# EAGLE board Breakout (EAGLE 8.4.1)
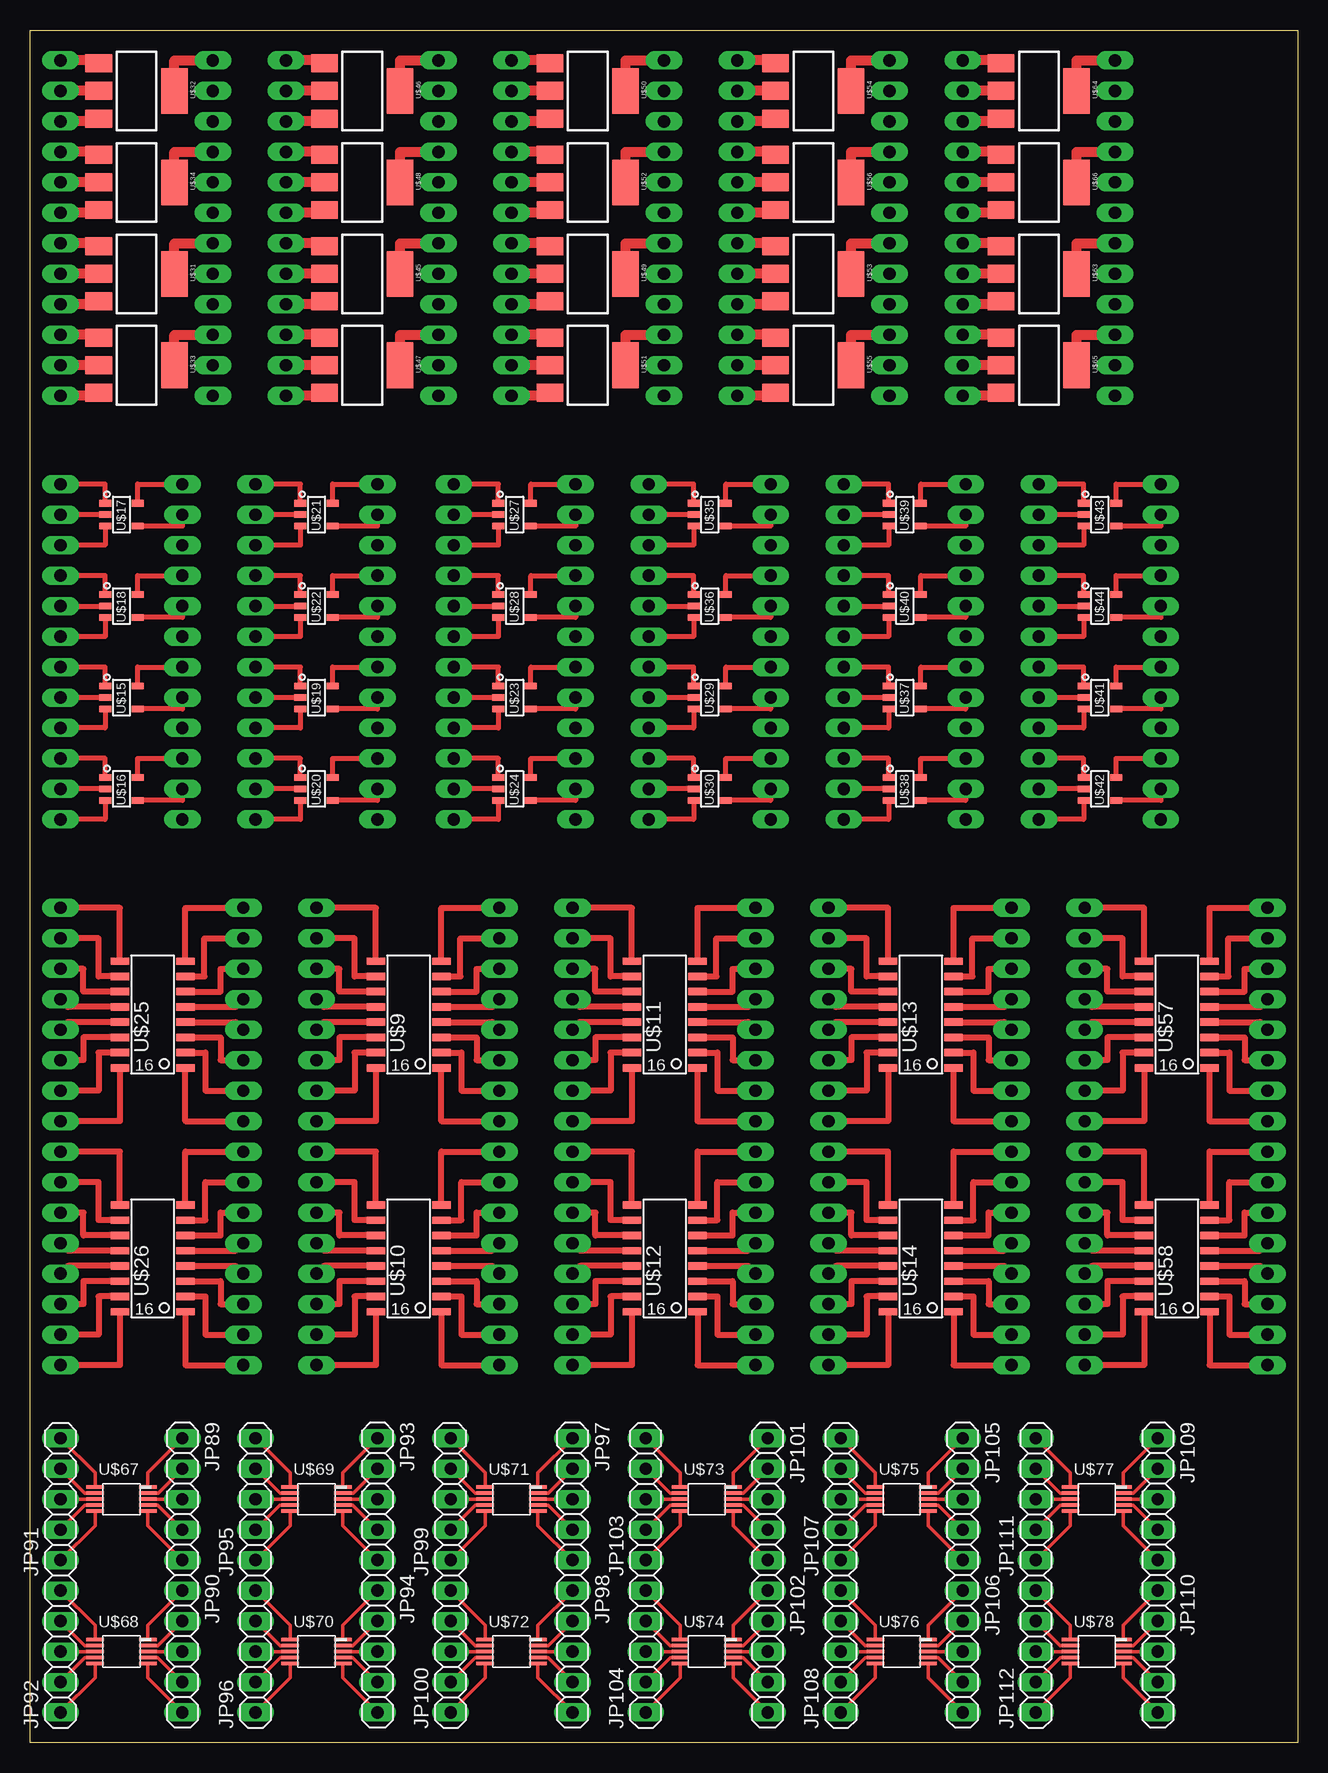
[diagram p0: board, top side]
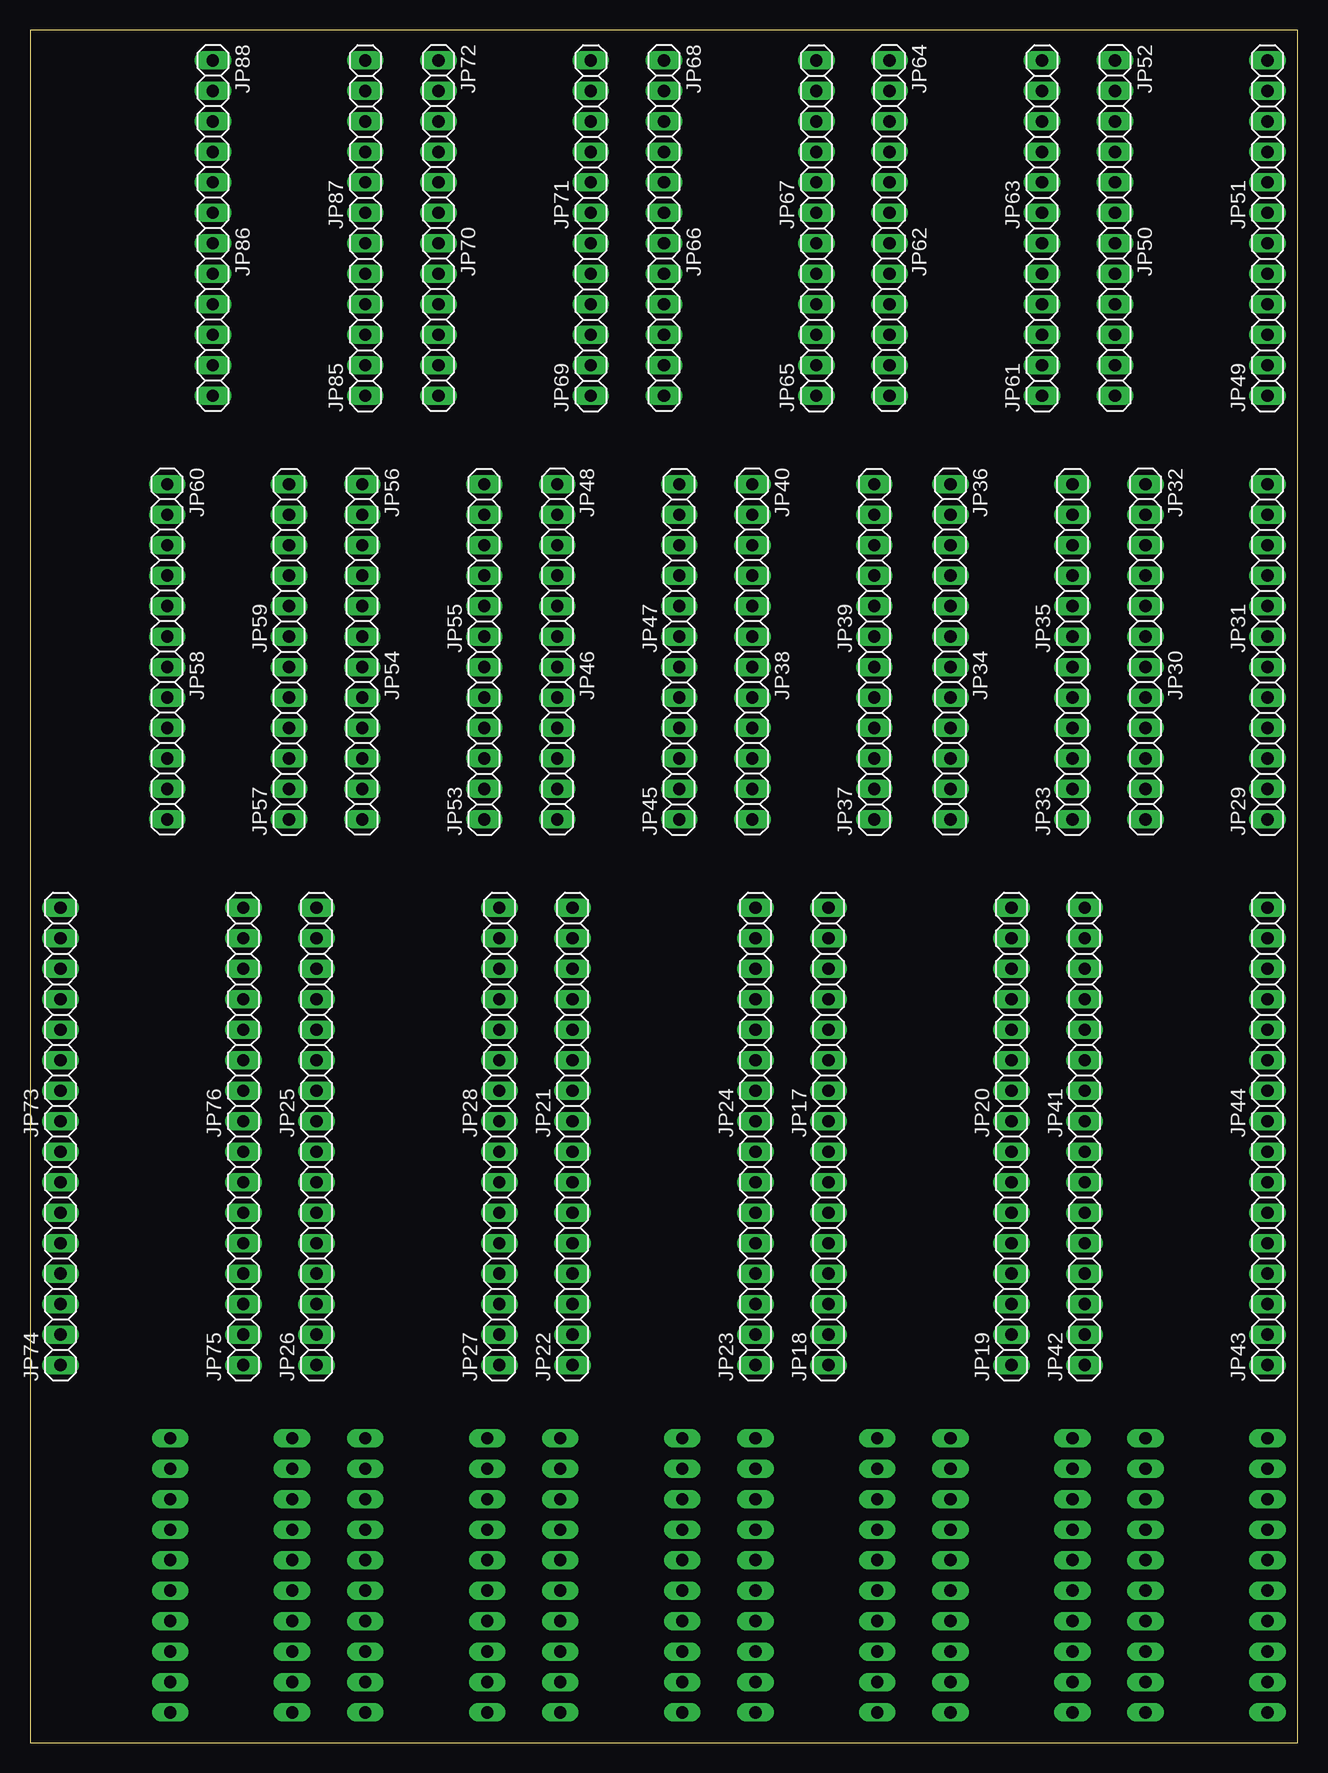
[diagram p1: board, bottom side, seen from below]

Size 105.66 x 142.75 mm. Coordinates in mm from the lower left corner, seen from the top.
Outline: 0,0 0,142.75 105.66,142.75 105.66,0 0,0
Copper layers (1*16): Top 0.035mm / dielectric 1.5mm / Bottom 0.035mm
Design rules "DRC Advanced Circuits": minimum track width 6mil, minimum drill 15mil, track to track 6mil, track to pad 6mil, pad to pad 6mil, via to via 6mil, smd to smd 6mil, copper to edge 40mil, drill to drill 6mil, minimum pad ring 10mil, minimum via ring 8mil, stop-mask expansion 4mil, vias tented up to drill 0mil, thermal gap 10mil

## Footprints (pad centres in the part's own frame; a part is rotated, then mirrored left to right if it is on the bottom)
1X08 = drill 1.016 long: 1 -8.89,0; 2 -6.35,0; 3 -3.81,0; 4 -1.27,0; 5 1.27,0; 6 3.81,0; 7 6.35,0; 8 8.89,0
1X06 = drill 1.016 long: 1 -6.35,0; 2 -3.81,0; 3 -1.27,0; 4 1.27,0; 5 3.81,0; 6 6.35,0
1X05 = drill 1.016 long: 1 -5.08,0; 2 -2.54,0; 3 0,0; 4 2.54,0; 5 5.08,0
SOIC-16 = smd 0.61 x 1.524: 1 -4.445,-2.794; 2 -3.175,-2.794; 3 -1.905,-2.794; 4 -0.635,-2.794; 5 0.635,-2.794; 6 1.905,-2.794; 7 3.175,-2.794; 8 4.445,-2.794; 9 4.445,2.667; 10 3.175,2.667; 11 1.905,2.667; 12 0.635,2.667; 13 -0.635,2.667; 14 -1.905,2.667; 15 -3.175,2.667; 16 -4.445,2.667
SOT-23-5 = smd 1 x 0.55: 1 -1.35,0.95; 2 -1.35,0; 3 -1.35,-0.95; 4 1.35,-0.95; 5 1.35,0.95
SOT223 = smd 1.5 x 2.235: 1 -2.3,-3.15; 2 0,-3.15; 3 2.3,-3.15 | smd 3.8 x 2.2: 4 0,3.15
VSSOP-10 = smd 0.3 x 1.45: 1 -1,-2.2; 2 -0.5,-2.2; 3 0,-2.2; 4 0.5,-2.2; 5 1,-2.2; 6 1,2.2; 7 0.5,2.2; 8 0,2.2; 9 -0.5,2.2; 10 -1,2.2

## Placement (x,y rotation side)
JP17  [1X08]  39.12,60.71 90 bottom
JP18  [1X08]  39.12,40.39 90 bottom
JP19  [1X08]  23.88,40.39 90 bottom
JP20  [1X08]  23.88,60.71 90 bottom
JP21  [1X08]  60.45,60.71 90 bottom
JP22  [1X08]  60.45,40.39 90 bottom
JP23  [1X08]  45.21,40.39 90 bottom
JP24  [1X08]  45.21,60.71 90 bottom
JP25  [1X08]  81.79,60.71 90 bottom
JP26  [1X08]  81.79,40.39 90 bottom
JP27  [1X08]  66.55,40.39 90 bottom
JP28  [1X08]  66.55,60.71 90 bottom
JP29  [1X06]  2.54,83.31 90 bottom
JP30  [1X06]  12.7,83.31 270 bottom
JP31  [1X06]  2.54,98.55 90 bottom
JP32  [1X06]  12.7,98.55 270 bottom
JP33  [1X06]  18.8,83.31 90 bottom
JP34  [1X06]  28.96,83.31 270 bottom
JP35  [1X06]  18.8,98.55 90 bottom
JP36  [1X06]  28.96,98.55 270 bottom
JP37  [1X06]  35.31,83.31 90 bottom
JP38  [1X06]  45.47,83.31 270 bottom
JP39  [1X06]  35.31,98.55 90 bottom
JP40  [1X06]  45.47,98.55 270 bottom
JP41  [1X08]  17.78,60.71 90 bottom
JP42  [1X08]  17.78,40.39 90 bottom
JP43  [1X08]  2.54,40.39 90 bottom
JP44  [1X08]  2.54,60.71 90 bottom
JP45  [1X06]  51.56,83.31 90 bottom
JP46  [1X06]  61.72,83.31 270 bottom
JP47  [1X06]  51.56,98.55 90 bottom
JP48  [1X06]  61.72,98.55 270 bottom
JP49  [1X06]  2.54,118.62 90 bottom
JP50  [1X06]  15.24,118.62 270 bottom
JP51  [1X06]  2.54,133.86 90 bottom
JP52  [1X06]  15.24,133.86 270 bottom
JP53  [1X06]  67.82,83.31 90 bottom
JP54  [1X06]  77.98,83.31 270 bottom
JP55  [1X06]  67.82,98.55 90 bottom
JP56  [1X06]  77.98,98.55 270 bottom
JP57  [1X06]  84.07,83.31 90 bottom
JP58  [1X06]  94.23,83.31 270 bottom
JP59  [1X06]  84.07,98.55 90 bottom
JP60  [1X06]  94.23,98.55 270 bottom
JP61  [1X06]  21.34,118.62 90 bottom
JP62  [1X06]  34.04,118.62 270 bottom
JP63  [1X06]  21.34,133.86 90 bottom
JP64  [1X06]  34.04,133.86 270 bottom
JP65  [1X06]  40.13,118.62 90 bottom
JP66  [1X06]  52.83,118.62 270 bottom
JP67  [1X06]  40.13,133.86 90 bottom
JP68  [1X06]  52.83,133.86 270 bottom
JP69  [1X06]  58.93,118.62 90 bottom
JP70  [1X06]  71.63,118.62 270 bottom
JP71  [1X06]  58.93,133.86 90 bottom
JP72  [1X06]  71.63,133.86 270 bottom
JP73  [1X08]  103.12,60.71 90 bottom
JP74  [1X08]  103.12,40.39 90 bottom
JP75  [1X08]  87.88,40.39 90 bottom
JP76  [1X08]  87.88,60.71 90 bottom
JP85  [1X06]  77.72,118.62 90 bottom
JP86  [1X06]  90.42,118.62 270 bottom
JP87  [1X06]  77.72,133.86 90 bottom
JP88  [1X06]  90.42,133.86 270 bottom
JP89  [1X05]  12.7,20.32 270 top
JP90  [1X05]  12.7,7.62 270 top
JP91  [1X05]  2.54,20.32 90 top
JP92  [1X05]  2.54,7.62 90 top
JP93  [1X05]  28.96,20.32 270 top
JP94  [1X05]  28.96,7.62 270 top
JP95  [1X05]  18.8,20.32 90 top
JP96  [1X05]  18.8,7.62 90 top
JP97  [1X05]  45.21,20.32 270 top
JP98  [1X05]  45.21,7.62 270 top
JP99  [1X05]  35.05,20.32 90 top
JP100  [1X05]  35.05,7.62 90 top
JP101  [1X05]  61.47,20.32 270 top
JP102  [1X05]  61.47,7.62 270 top
JP103  [1X05]  51.31,20.32 90 top
JP104  [1X05]  51.31,7.62 90 top
JP105  [1X05]  77.72,20.32 270 top
JP106  [1X05]  77.72,7.62 270 top
JP107  [1X05]  67.56,20.32 90 top
JP108  [1X05]  67.56,7.62 90 top
JP109  [1X05]  93.98,20.32 270 top
JP110  [1X05]  93.98,7.62 270 top
JP111  [1X05]  83.82,20.32 90 top
JP112  [1X05]  83.82,7.62 90 top
U$9  SOIC16  [SOIC-16]  31.5,60.71 90 top
U$10  SOIC16  [SOIC-16]  31.5,40.39 90 top
U$11  SOIC16  [SOIC-16]  52.83,60.71 90 top
U$12  SOIC16  [SOIC-16]  52.83,40.39 90 top
U$13  SOIC16  [SOIC-16]  74.17,60.71 90 top
U$14  SOIC16  [SOIC-16]  74.17,40.39 90 top
U$15  SN74LVC1G06  [SOT-23-5]  7.62,87.12 0 top
U$16  SN74LVC1G07  [SOT-23-5]  7.62,79.5 0 top
U$17  SN74LVC1G06  [SOT-23-5]  7.62,102.36 0 top
U$18  SN74LVC1G07  [SOT-23-5]  7.62,94.74 0 top
U$19  SN74LVC1G06  [SOT-23-5]  23.88,87.12 0 top
U$20  SN74LVC1G07  [SOT-23-5]  23.88,79.5 0 top
U$21  SN74LVC1G06  [SOT-23-5]  23.88,102.36 0 top
U$22  SN74LVC1G07  [SOT-23-5]  23.88,94.74 0 top
U$23  SN74LVC1G06  [SOT-23-5]  40.39,87.12 0 top
U$24  SN74LVC1G07  [SOT-23-5]  40.39,79.5 0 top
U$25  SOIC16  [SOIC-16]  10.16,60.71 90 top
U$26  SOIC16  [SOIC-16]  10.16,40.39 90 top
U$27  SN74LVC1G06  [SOT-23-5]  40.39,102.36 0 top
U$28  SN74LVC1G07  [SOT-23-5]  40.39,94.74 0 top
U$29  SN74LVC1G06  [SOT-23-5]  56.64,87.12 0 top
U$30  SN74LVC1G07  [SOT-23-5]  56.64,79.5 0 top
U$31  SOT223  [SOT223]  8.89,122.43 270 top
U$32  SOT223  [SOT223]  8.89,137.67 270 top
U$33  SOT223  [SOT223]  8.89,114.81 270 top
U$34  SOT223  [SOT223]  8.89,130.05 270 top
U$35  SN74LVC1G06  [SOT-23-5]  56.64,102.36 0 top
U$36  SN74LVC1G07  [SOT-23-5]  56.64,94.74 0 top
U$37  SN74LVC1G06  [SOT-23-5]  72.9,87.12 0 top
U$38  SN74LVC1G07  [SOT-23-5]  72.9,79.5 0 top
U$39  SN74LVC1G06  [SOT-23-5]  72.9,102.36 0 top
U$40  SN74LVC1G07  [SOT-23-5]  72.9,94.74 0 top
U$41  SN74LVC1G06  [SOT-23-5]  89.15,87.12 0 top
U$42  SN74LVC1G07  [SOT-23-5]  89.15,79.5 0 top
U$43  SN74LVC1G06  [SOT-23-5]  89.15,102.36 0 top
U$44  SN74LVC1G07  [SOT-23-5]  89.15,94.74 0 top
U$45  SOT223  [SOT223]  27.69,122.43 270 top
U$46  SOT223  [SOT223]  27.69,137.67 270 top
U$47  SOT223  [SOT223]  27.69,114.81 270 top
U$48  SOT223  [SOT223]  27.69,130.05 270 top
U$49  SOT223  [SOT223]  46.48,122.43 270 top
U$50  SOT223  [SOT223]  46.48,137.67 270 top
U$51  SOT223  [SOT223]  46.48,114.81 270 top
U$52  SOT223  [SOT223]  46.48,130.05 270 top
U$53  SOT223  [SOT223]  65.28,122.43 270 top
U$54  SOT223  [SOT223]  65.28,137.67 270 top
U$55  SOT223  [SOT223]  65.28,114.81 270 top
U$56  SOT223  [SOT223]  65.28,130.05 270 top
U$57  SOIC16  [SOIC-16]  95.5,60.71 90 top
U$58  SOIC16  [SOIC-16]  95.5,40.39 90 top
U$63  SOT223  [SOT223]  84.07,122.43 270 top
U$64  SOT223  [SOT223]  84.07,137.67 270 top
U$65  SOT223  [SOT223]  84.07,114.81 270 top
U$66  SOT223  [SOT223]  84.07,130.05 270 top
U$67  INA226  [VSSOP-10]  7.62,20.32 270 top
U$68  INA226  [VSSOP-10]  7.62,7.62 270 top
U$69  INA226  [VSSOP-10]  23.88,20.32 270 top
U$70  INA226  [VSSOP-10]  23.88,7.62 270 top
U$71  INA226  [VSSOP-10]  40.13,20.32 270 top
U$72  INA226  [VSSOP-10]  40.13,7.62 270 top
U$73  INA226  [VSSOP-10]  56.39,20.32 270 top
U$74  INA226  [VSSOP-10]  56.39,7.62 270 top
U$75  INA226  [VSSOP-10]  72.64,20.32 270 top
U$76  INA226  [VSSOP-10]  72.64,7.62 270 top
U$77  INA226  [VSSOP-10]  88.9,20.32 270 top
U$78  INA226  [VSSOP-10]  88.9,7.62 270 top

## Library data of the parts
JP17-JP76 JP85-JP112 U$9-U$58 U$63-U$78 = HyTechDevices

## Nets
N$81: JP17.1 U$9.1
N$82: JP17.2 U$9.2
N$83: JP17.3 U$9.3
N$84: JP17.4 U$9.4
N$85: JP17.5 U$9.5
N$86: JP17.6 U$9.6
N$87: JP17.7 U$9.7
N$88: JP17.8 U$9.8
N$89: JP18.1 U$10.1
N$90: JP18.2 U$10.2
N$91: JP18.3 U$10.3
N$92: JP18.4 U$10.4
N$93: JP18.5 U$10.5
N$94: JP18.6 U$10.6
N$95: JP18.7 U$10.7
N$96: JP18.8 U$10.8
N$97: JP19.1 U$10.16
N$98: JP19.2 U$10.15
N$99: JP19.3 U$10.14
N$100: JP19.4 U$10.13
N$101: JP19.5 U$10.12
N$102: JP19.6 U$10.11
N$103: JP19.7 U$10.10
N$104: JP19.8 U$10.9
N$105: JP20.1 U$9.16
N$106: JP20.2 U$9.15
N$107: JP20.3 U$9.14
N$108: JP20.4 U$9.13
N$109: JP20.5 U$9.12
N$110: JP20.6 U$9.11
N$111: JP20.7 U$9.10
N$112: JP20.8 U$9.9
N$113: JP21.1 U$11.1
N$114: JP21.2 U$11.2
N$115: JP21.3 U$11.3
N$116: JP21.4 U$11.4
N$117: JP21.5 U$11.5
N$118: JP21.6 U$11.6
N$119: JP21.7 U$11.7
N$120: JP21.8 U$11.8
N$121: JP22.1 U$12.1
N$122: JP22.2 U$12.2
N$123: JP22.3 U$12.3
N$124: JP22.4 U$12.4
N$125: JP22.5 U$12.5
N$126: JP22.6 U$12.6
N$127: JP22.7 U$12.7
N$128: JP22.8 U$12.8
N$129: JP23.1 U$12.16
N$130: JP23.2 U$12.15
N$131: JP23.3 U$12.14
N$132: JP23.4 U$12.13
N$133: JP23.5 U$12.12
N$134: JP23.6 U$12.11
N$135: JP23.7 U$12.10
N$136: JP23.8 U$12.9
N$137: JP24.1 U$11.16
N$138: JP24.2 U$11.15
N$139: JP24.3 U$11.14
N$140: JP24.4 U$11.13
N$141: JP24.5 U$11.12
N$142: JP24.6 U$11.11
N$143: JP24.7 U$11.10
N$144: JP24.8 U$11.9
N$145: JP25.1 U$13.1
N$146: JP25.2 U$13.2
N$147: JP25.3 U$13.3
N$148: JP25.4 U$13.4
N$149: JP25.5 U$13.5
N$150: JP25.6 U$13.6
N$151: JP25.7 U$13.7
N$152: JP25.8 U$13.8
N$153: JP26.1 U$14.1
N$154: JP26.2 U$14.2
N$155: JP26.3 U$14.3
N$156: JP26.4 U$14.4
N$157: JP26.5 U$14.5
N$158: JP26.6 U$14.6
N$159: JP26.7 U$14.7
N$160: JP26.8 U$14.8
N$161: JP27.1 U$14.16
N$162: JP27.2 U$14.15
N$163: JP27.3 U$14.14
N$164: JP27.4 U$14.13
N$165: JP27.5 U$14.12
N$166: JP27.6 U$14.11
N$167: JP27.7 U$14.10
N$168: JP27.8 U$14.9
N$169: JP28.1 U$13.16
N$170: JP28.2 U$13.15
N$171: JP28.3 U$13.14
N$172: JP28.4 U$13.13
N$173: JP28.5 U$13.12
N$174: JP28.6 U$13.11
N$175: JP28.7 U$13.10
N$176: JP28.8 U$13.9
N$177: JP30.1 U$15.5
N$178: JP30.2 U$15.4
N$179: JP30.4 U$16.5
N$180: JP30.5 U$16.4
N$181: JP29.6 U$15.1
N$182: JP29.5 U$15.2
N$183: JP29.4 U$15.3
N$184: JP29.3 U$16.1
N$185: JP29.2 U$16.2
N$186: JP29.1 U$16.3
N$187: JP32.1 U$17.5
N$188: JP32.2 U$17.4
N$189: JP32.4 U$18.5
N$190: JP32.5 U$18.4
N$191: JP31.6 U$17.1
N$192: JP31.5 U$17.2
N$193: JP31.4 U$17.3
N$194: JP31.3 U$18.1
N$195: JP31.2 U$18.2
N$196: JP31.1 U$18.3
N$197: JP34.1 U$19.5
N$198: JP34.2 U$19.4
N$199: JP34.4 U$20.5
N$200: JP34.5 U$20.4
N$201: JP33.6 U$19.1
N$202: JP33.5 U$19.2
N$203: JP33.4 U$19.3
N$204: JP33.3 U$20.1
N$205: JP33.2 U$20.2
N$206: JP33.1 U$20.3
N$207: JP36.1 U$21.5
N$208: JP36.2 U$21.4
N$209: JP36.4 U$22.5
N$210: JP36.5 U$22.4
N$211: JP35.6 U$21.1
N$212: JP35.5 U$21.2
N$213: JP35.4 U$21.3
N$214: JP35.3 U$22.1
N$215: JP35.2 U$22.2
N$216: JP35.1 U$22.3
N$217: JP38.1 U$23.5
N$218: JP38.2 U$23.4
N$219: JP38.4 U$24.5
N$220: JP38.5 U$24.4
N$221: JP37.6 U$23.1
N$222: JP37.5 U$23.2
N$223: JP37.4 U$23.3
N$224: JP37.3 U$24.1
N$225: JP37.2 U$24.2
N$226: JP37.1 U$24.3
N$227: JP40.1 U$27.5
N$228: JP40.2 U$27.4
N$229: JP40.4 U$28.5
N$230: JP40.5 U$28.4
N$231: JP39.6 U$27.1
N$232: JP39.5 U$27.2
N$233: JP39.4 U$27.3
N$234: JP39.3 U$28.1
N$235: JP39.2 U$28.2
N$236: JP39.1 U$28.3
N$237: JP46.1 U$29.5
N$238: JP46.2 U$29.4
N$239: JP46.4 U$30.5
N$240: JP46.5 U$30.4
N$241: JP45.6 U$29.1
N$242: JP45.5 U$29.2
N$243: JP45.4 U$29.3
N$244: JP45.3 U$30.1
N$245: JP41.1 U$25.1
N$246: JP41.2 U$25.2
N$247: JP41.3 U$25.3
N$248: JP41.4 U$25.4
N$249: JP41.5 U$25.5
N$250: JP41.6 U$25.6
N$251: JP41.7 U$25.7
N$252: JP41.8 U$25.8
N$253: JP42.1 U$26.1
N$254: JP42.2 U$26.2
N$255: JP42.3 U$26.3
N$256: JP42.4 U$26.4
N$257: JP42.5 U$26.5
N$258: JP42.6 U$26.6
N$259: JP42.7 U$26.7
N$260: JP42.8 U$26.8
N$261: JP43.1 U$26.16
N$262: JP43.2 U$26.15
N$263: JP43.3 U$26.14
N$264: JP43.4 U$26.13
N$265: JP43.5 U$26.12
N$266: JP43.6 U$26.11
N$267: JP43.7 U$26.10
N$268: JP43.8 U$26.9
N$269: JP44.1 U$25.16
N$270: JP44.2 U$25.15
N$271: JP44.3 U$25.14
N$272: JP44.4 U$25.13
N$273: JP44.5 U$25.12
N$274: JP44.6 U$25.11
N$275: JP44.7 U$25.10
N$276: JP44.8 U$25.9
N$277: JP45.2 U$30.2
N$278: JP45.1 U$30.3
N$279: JP48.1 U$35.5
N$280: JP48.2 U$35.4
N$281: JP48.4 U$36.5
N$282: JP48.5 U$36.4
N$283: JP47.6 U$35.1
N$284: JP47.5 U$35.2
N$285: JP47.4 U$35.3
N$286: JP47.3 U$36.1
N$287: JP47.2 U$36.2
N$288: JP47.1 U$36.3
N$289: JP54.1 U$37.5
N$290: JP54.2 U$37.4
N$291: JP54.4 U$38.5
N$292: JP54.5 U$38.4
N$293: JP53.6 U$37.1
N$294: JP53.5 U$37.2
N$295: JP53.4 U$37.3
N$296: JP53.3 U$38.1
N$297: JP50.1 U$31.4
N$298: JP49.6 U$31.1
N$299: JP49.5 U$31.2
N$300: JP49.4 U$31.3
N$301: JP49.3 U$33.1
N$302: JP49.2 U$33.2
N$303: JP49.1 U$33.3
N$304: JP50.4 U$33.4
N$305: JP52.1 U$32.4
N$306: JP52.4 U$34.4
N$307: JP51.6 U$32.1
N$308: JP51.5 U$32.2
N$309: JP51.4 U$32.3
N$310: JP51.3 U$34.1
N$311: JP51.2 U$34.2
N$312: JP51.1 U$34.3
N$313: JP53.2 U$38.2
N$314: JP53.1 U$38.3
N$315: JP56.1 U$39.5
N$316: JP56.2 U$39.4
N$317: JP56.4 U$40.5
N$318: JP56.5 U$40.4
N$319: JP55.6 U$39.1
N$320: JP55.5 U$39.2
N$321: JP55.4 U$39.3
N$322: JP55.3 U$40.1
N$323: JP55.2 U$40.2
N$324: JP55.1 U$40.3
N$325: JP58.1 U$41.5
N$326: JP58.2 U$41.4
N$327: JP58.4 U$42.5
N$328: JP58.5 U$42.4
N$329: JP57.6 U$41.1
N$330: JP57.5 U$41.2
N$331: JP57.4 U$41.3
N$332: JP57.3 U$42.1
N$333: JP57.2 U$42.2
N$334: JP57.1 U$42.3
N$335: JP60.1 U$43.5
N$336: JP60.2 U$43.4
N$337: JP60.4 U$44.5
N$338: JP60.5 U$44.4
N$339: JP59.6 U$43.1
N$340: JP59.5 U$43.2
N$341: JP59.4 U$43.3
N$342: JP59.3 U$44.1
N$343: JP59.2 U$44.2
N$344: JP59.1 U$44.3
N$345: JP62.1 U$45.4
N$346: JP61.6 U$45.1
N$347: JP61.5 U$45.2
N$348: JP61.4 U$45.3
N$349: JP61.3 U$47.1
N$350: JP61.2 U$47.2
N$351: JP61.1 U$47.3
N$352: JP62.4 U$47.4
N$353: JP64.1 U$46.4
N$354: JP64.4 U$48.4
N$355: JP63.6 U$46.1
N$356: JP63.5 U$46.2
N$357: JP63.4 U$46.3
N$358: JP63.3 U$48.1
N$359: JP63.2 U$48.2
N$360: JP63.1 U$48.3
N$361: JP66.1 U$49.4
N$362: JP65.6 U$49.1
N$363: JP65.5 U$49.2
N$364: JP65.4 U$49.3
N$365: JP65.3 U$51.1
N$366: JP65.2 U$51.2
N$367: JP65.1 U$51.3
N$368: JP66.4 U$51.4
N$369: JP68.1 U$50.4
N$370: JP68.4 U$52.4
N$371: JP67.6 U$50.1
N$372: JP67.5 U$50.2
N$373: JP67.4 U$50.3
N$374: JP67.3 U$52.1
N$375: JP67.2 U$52.2
N$376: JP67.1 U$52.3
N$377: JP70.1 U$53.4
N$378: JP69.6 U$53.1
N$379: JP69.5 U$53.2
N$380: JP69.4 U$53.3
N$381: JP69.3 U$55.1
N$382: JP69.2 U$55.2
N$383: JP69.1 U$55.3
N$384: JP70.4 U$55.4
N$385: JP72.1 U$54.4
N$386: JP72.4 U$56.4
N$387: JP71.6 U$54.1
N$388: JP71.5 U$54.2
N$389: JP71.4 U$54.3
N$390: JP71.3 U$56.1
N$391: JP71.2 U$56.2
N$392: JP71.1 U$56.3
N$393: JP73.1 U$57.1
N$394: JP73.2 U$57.2
N$395: JP73.3 U$57.3
N$396: JP73.4 U$57.4
N$397: JP73.5 U$57.5
N$398: JP73.6 U$57.6
N$399: JP73.7 U$57.7
N$400: JP73.8 U$57.8
N$401: JP74.1 U$58.1
N$402: JP74.2 U$58.2
N$403: JP74.3 U$58.3
N$404: JP74.4 U$58.4
N$405: JP74.5 U$58.5
N$406: JP74.6 U$58.6
N$407: JP74.7 U$58.7
N$408: JP74.8 U$58.8
N$409: JP75.1 U$58.16
N$410: JP75.2 U$58.15
N$411: JP75.3 U$58.14
N$412: JP75.4 U$58.13
N$413: JP75.5 U$58.12
N$414: JP75.6 U$58.11
N$415: JP75.7 U$58.10
N$416: JP75.8 U$58.9
N$417: JP76.1 U$57.16
N$418: JP76.2 U$57.15
N$419: JP76.3 U$57.14
N$420: JP76.4 U$57.13
N$421: JP76.5 U$57.12
N$422: JP76.6 U$57.11
N$423: JP76.7 U$57.10
N$424: JP76.8 U$57.9
N$465: JP86.1 U$63.4
N$466: JP85.6 U$63.1
N$467: JP85.5 U$63.2
N$468: JP85.4 U$63.3
N$469: JP85.3 U$65.1
N$470: JP85.2 U$65.2
N$471: JP85.1 U$65.3
N$472: JP86.4 U$65.4
N$473: JP88.1 U$64.4
N$474: JP88.4 U$66.4
N$475: JP87.6 U$64.1
N$476: JP87.5 U$64.2
N$477: JP87.4 U$64.3
N$478: JP87.3 U$66.1
N$479: JP87.2 U$66.2
N$480: JP87.1 U$66.3
N$481: JP92.1 U$68.5
N$482: JP92.2 U$68.4
N$483: JP92.3 U$68.3
N$484: JP92.4 U$68.2
N$485: JP92.5 U$68.1
N$486: JP91.1 U$67.5
N$487: JP91.2 U$67.4
N$488: JP91.3 U$67.3
N$489: JP91.4 U$67.2
N$490: JP91.5 U$67.1
N$491: JP90.1 U$68.10
N$492: JP90.2 U$68.9
N$493: JP90.3 U$68.8
N$494: JP90.4 U$68.7
N$495: JP90.5 U$68.6
N$496: JP89.1 U$67.10
N$497: JP89.2 U$67.9
N$498: JP89.3 U$67.8
N$499: JP89.4 U$67.7
N$500: JP89.5 U$67.6
N$501: JP96.1 U$70.5
N$502: JP96.2 U$70.4
N$503: JP96.3 U$70.3
N$504: JP96.4 U$70.2
N$505: JP96.5 U$70.1
N$506: JP95.1 U$69.5
N$507: JP95.2 U$69.4
N$508: JP95.3 U$69.3
N$509: JP95.4 U$69.2
N$510: JP95.5 U$69.1
N$511: JP94.1 U$70.10
N$512: JP94.2 U$70.9
N$513: JP94.3 U$70.8
N$514: JP94.4 U$70.7
N$515: JP94.5 U$70.6
N$516: JP93.1 U$69.10
N$517: JP93.2 U$69.9
N$518: JP93.3 U$69.8
N$519: JP93.4 U$69.7
N$520: JP93.5 U$69.6
N$521: JP100.1 U$72.5
N$522: JP100.2 U$72.4
N$523: JP100.3 U$72.3
N$524: JP100.4 U$72.2
N$525: JP100.5 U$72.1
N$526: JP99.1 U$71.5
N$527: JP99.2 U$71.4
N$528: JP99.3 U$71.3
N$529: JP99.4 U$71.2
N$530: JP99.5 U$71.1
N$531: JP98.1 U$72.10
N$532: JP98.2 U$72.9
N$533: JP98.3 U$72.8
N$534: JP98.4 U$72.7
N$535: JP98.5 U$72.6
N$536: JP97.1 U$71.10
N$537: JP97.2 U$71.9
N$538: JP97.3 U$71.8
N$539: JP97.4 U$71.7
N$540: JP97.5 U$71.6
N$541: JP104.1 U$74.5
N$542: JP104.2 U$74.4
N$543: JP104.3 U$74.3
N$544: JP104.4 U$74.2
N$545: JP104.5 U$74.1
N$546: JP103.1 U$73.5
N$547: JP103.2 U$73.4
N$548: JP103.3 U$73.3
N$549: JP103.4 U$73.2
N$550: JP103.5 U$73.1
N$551: JP102.1 U$74.10
N$552: JP102.2 U$74.9
N$553: JP102.3 U$74.8
N$554: JP102.4 U$74.7
N$555: JP102.5 U$74.6
N$556: JP101.1 U$73.10
N$557: JP101.2 U$73.9
N$558: JP101.3 U$73.8
N$559: JP101.4 U$73.7
N$560: JP101.5 U$73.6
N$561: JP108.1 U$76.5
N$562: JP108.2 U$76.4
N$563: JP108.3 U$76.3
N$564: JP108.4 U$76.2
N$565: JP108.5 U$76.1
N$566: JP107.1 U$75.5
N$567: JP107.2 U$75.4
N$568: JP107.3 U$75.3
N$569: JP107.4 U$75.2
N$570: JP107.5 U$75.1
N$571: JP106.1 U$76.10
N$572: JP106.2 U$76.9
N$573: JP106.3 U$76.8
N$574: JP106.4 U$76.7
N$575: JP106.5 U$76.6
N$576: JP105.1 U$75.10
N$577: JP105.2 U$75.9
N$578: JP105.3 U$75.8
N$579: JP105.4 U$75.7
N$580: JP105.5 U$75.6
N$581: JP112.1 U$78.5
N$582: JP112.2 U$78.4
N$583: JP112.3 U$78.3
N$584: JP112.4 U$78.2
N$585: JP112.5 U$78.1
N$586: JP111.1 U$77.5
N$587: JP111.2 U$77.4
N$588: JP111.3 U$77.3
N$589: JP111.4 U$77.2
N$590: JP111.5 U$77.1
N$591: JP110.1 U$78.10
N$592: JP110.2 U$78.9
N$593: JP110.3 U$78.8
N$594: JP110.4 U$78.7
N$595: JP110.5 U$78.6
N$596: JP109.1 U$77.10
N$597: JP109.2 U$77.9
N$598: JP109.3 U$77.8
N$599: JP109.4 U$77.7
N$600: JP109.5 U$77.6

## Tracks (layer width: path | path; a pad name or v marks a point on that pad's centre or on a via)
N$81
  Top 0.508: U$9.1 34.29,51.82 JP17.1
N$82
  Top 0.508: U$9.2 35.94,57.53 35.94,54.36 JP17.2
N$83
  Top 0.508: U$9.3 37.21,58.8 37.21,56.9 JP17.3
N$84
  Top 0.508: U$9.4 38.48,60.07 38.48,59.44 JP17.4
N$85
  Top 0.508: U$9.5 38.48,61.34 38.48,61.98 JP17.5
N$86
  Top 0.508: U$9.6 37.21,62.61 37.21,64.52 JP17.6
N$87
  Top 0.508: U$9.7 35.87,63.88 35.87,67.06 JP17.7
N$88
  Top 0.508: U$9.8 34.29,69.6 JP17.8
N$89
  Top 0.508: U$10.1 34.29,31.5 JP18.1
N$90
  Top 0.508: U$10.2 35.94,37.21 35.94,34.04 JP18.2
N$91
  Top 0.508: U$10.3 37.21,38.48 37.21,36.58 JP18.3
N$92
  Top 0.508: U$10.4 38.48,39.75 38.48,39.12 JP18.4
N$93
  Top 0.508: U$10.5 38.48,41.02 38.48,41.66 JP18.5
N$94
  Top 0.508: U$10.6 37.21,42.29 37.21,44.2 JP18.6
N$95
  Top 0.508: U$10.7 35.94,43.56 35.94,46.74 JP18.7
N$96
  Top 0.508: U$10.8 34.29,49.28 JP18.8
N$97
  Top 0.508: U$10.16 28.83,31.5 JP19.1
N$98
  Top 0.508: U$10.15 27.05,37.21 27.05,34.04 JP19.2
N$99
  Top 0.508: U$10.14 25.78,38.48 25.78,36.58 JP19.3
N$100
  Top 0.508: U$10.13 24.51,39.75 24.51,39.12 JP19.4
N$101
  Top 0.508: U$10.12 24.51,41.02 24.51,41.66 JP19.5
N$102
  Top 0.508: U$10.11 25.78,42.29 25.78,44.2 JP19.6
N$103
  Top 0.508: U$10.10 27.05,43.56 27.05,46.74 JP19.7
N$104
  Top 0.508: U$10.9 28.83,49.28 JP19.8
N$105
  Top 0.508: U$9.16 28.83,51.82 JP20.1
N$106
  Top 0.508: U$9.15 27.05,57.53 27.05,54.36 JP20.2
N$107
  Top 0.508: U$9.14 25.78,58.8 25.78,56.9 JP20.3
N$108
  Top 0.508: U$9.13 24.51,60.07 24.51,59.44 JP20.4
N$109
  Top 0.508: U$9.12 24.51,61.34 24.51,61.98 JP20.5
N$110
  Top 0.508: U$9.11 25.78,62.61 25.78,64.52 JP20.6
N$111
  Top 0.508: U$9.10 27.05,63.88 27.05,67.06 JP20.7
N$112
  Top 0.508: U$9.9 28.83,69.6 JP20.8
N$113
  Top 0.508: U$11.1 55.63,51.82 JP21.1
N$114
  Top 0.508: U$11.2 57.28,57.53 57.28,54.36 JP21.2
N$115
  Top 0.508: U$11.3 58.55,58.8 58.55,56.9 JP21.3
N$116
  Top 0.508: U$11.4 59.82,60.07 59.82,59.44 JP21.4
N$117
  Top 0.508: U$11.5 59.82,61.34 59.82,61.98 JP21.5
N$118
  Top 0.508: U$11.6 58.55,62.61 58.55,64.52 JP21.6
N$119
  Top 0.508: U$11.7 57.2,63.88 57.2,67.06 JP21.7
N$120
  Top 0.508: U$11.8 55.63,69.6 JP21.8
N$121
  Top 0.508: U$12.1 55.63,31.5 JP22.1
N$122
  Top 0.508: U$12.2 57.28,37.21 57.28,34.04 JP22.2
N$123
  Top 0.508: U$12.3 58.55,38.48 58.55,36.58 JP22.3
N$124
  Top 0.508: U$12.4 59.82,39.75 59.82,39.12 JP22.4
N$125
  Top 0.508: U$12.5 59.82,41.02 59.82,41.66 JP22.5
N$126
  Top 0.508: U$12.6 58.55,42.29 58.55,44.2 JP22.6
N$127
  Top 0.508: U$12.7 57.28,43.56 57.28,46.74 JP22.7
N$128
  Top 0.508: U$12.8 55.63,49.28 JP22.8
N$129
  Top 0.508: U$12.16 50.16,31.5 JP23.1
N$130
  Top 0.508: U$12.15 48.39,37.21 48.39,34.04 JP23.2
N$131
  Top 0.508: U$12.14 47.12,38.48 47.12,36.58 JP23.3
N$132
  Top 0.508: U$12.13 45.85,39.75 45.85,39.12 JP23.4
N$133
  Top 0.508: U$12.12 45.85,41.02 45.85,41.66 JP23.5
N$134
  Top 0.508: U$12.11 47.12,42.29 47.12,44.2 JP23.6
N$135
  Top 0.508: U$12.10 48.39,43.56 48.39,46.74 JP23.7
N$136
  Top 0.508: U$12.9 50.16,49.28 JP23.8
N$137
  Top 0.508: U$11.16 50.16,51.82 JP24.1
N$138
  Top 0.508: U$11.15 48.39,57.53 48.39,54.36 JP24.2
N$139
  Top 0.508: U$11.14 47.12,58.8 47.12,56.9 JP24.3
N$140
  Top 0.508: U$11.13 45.85,60.07 45.85,59.44 JP24.4
N$141
  Top 0.508: U$11.12 45.85,61.34 45.85,61.98 JP24.5
N$142
  Top 0.508: U$11.11 47.12,62.61 47.12,64.52 JP24.6
N$143
  Top 0.508: U$11.10 48.39,63.88 48.39,67.06 JP24.7
N$144
  Top 0.508: U$11.9 50.16,69.6 JP24.8
N$145
  Top 0.508: U$13.1 76.96,51.82 JP25.1
N$146
  Top 0.508: U$13.2 78.61,57.53 78.61,54.36 JP25.2
N$147
  Top 0.508: U$13.3 79.88,58.8 79.88,56.9 JP25.3
N$148
  Top 0.508: U$13.4 81.15,60.07 81.15,59.44 JP25.4
N$149
  Top 0.508: U$13.5 81.15,61.34 81.15,61.98 JP25.5
N$150
  Top 0.508: U$13.6 79.88,62.61 79.88,64.52 JP25.6
N$151
  Top 0.508: U$13.7 78.54,63.88 78.54,67.06 JP25.7
N$152
  Top 0.508: U$13.8 76.96,69.6 JP25.8
N$153
  Top 0.508: U$14.1 76.96,31.5 JP26.1
N$154
  Top 0.508: U$14.2 78.61,37.21 78.61,34.04 JP26.2
N$155
  Top 0.508: U$14.3 79.88,38.48 79.88,36.58 JP26.3
N$156
  Top 0.508: U$14.4 81.15,39.75 81.15,39.12 JP26.4
N$157
  Top 0.508: U$14.5 81.15,41.02 81.15,41.66 JP26.5
N$158
  Top 0.508: U$14.6 79.88,42.29 79.88,44.2 JP26.6
N$159
  Top 0.508: U$14.7 78.61,43.56 78.61,46.74 JP26.7
N$160
  Top 0.508: U$14.8 76.96,49.28 JP26.8
N$161
  Top 0.508: U$14.16 71.5,31.5 JP27.1
N$162
  Top 0.508: U$14.15 69.72,37.21 69.72,34.04 JP27.2
N$163
  Top 0.508: U$14.14 68.45,38.48 68.45,36.58 JP27.3
N$164
  Top 0.508: U$14.13 67.18,39.75 67.18,39.12 JP27.4
N$165
  Top 0.508: U$14.12 67.18,41.02 67.18,41.66 JP27.5
N$166
  Top 0.508: U$14.11 68.45,42.29 68.45,44.2 JP27.6
N$167
  Top 0.508: U$14.10 69.72,43.56 69.72,46.74 JP27.7
N$168
  Top 0.508: U$14.9 71.5,49.28 JP27.8
N$169
  Top 0.508: U$13.16 71.5,51.82 JP28.1
N$170
  Top 0.508: U$13.15 69.72,57.53 69.72,54.36 JP28.2
N$171
  Top 0.508: U$13.14 68.45,58.8 68.45,56.9 JP28.3
N$172
  Top 0.508: U$13.13 67.18,60.07 67.18,59.44 JP28.4
N$173
  Top 0.508: U$13.12 67.18,61.34 67.18,61.98 JP28.5
N$174
  Top 0.508: U$13.11 68.45,62.61 68.45,64.52 JP28.6
N$175
  Top 0.508: U$13.10 69.72,63.88 69.72,67.06 JP28.7
N$176
  Top 0.508: U$13.9 71.5,69.6 JP28.8
N$177
  Top 0.406: U$15.5 8.97,89.66 JP30.1
N$178
  Top 0.406: JP30.2 12.7,86.17 U$15.4
N$179
  Top 0.406: U$16.5 8.97,82.04 JP30.4
N$180
  Top 0.406: JP30.5 12.7,78.55 U$16.4
N$181
  Top 0.406: U$15.1 6.27,89.66 JP29.6
N$182
  Top 0.406: U$15.2 JP29.5
N$183
  Top 0.406: U$15.3 6.27,84.58 JP29.4
N$184
  Top 0.406: U$16.1 6.27,82.04 JP29.3
N$185
  Top 0.406: U$16.2 JP29.2
N$186
  Top 0.406: U$16.3 6.27,76.96 JP29.1
N$187
  Top 0.406: U$17.5 8.97,104.9 JP32.1
N$188
  Top 0.406: JP32.2 12.7,101.41 U$17.4
N$189
  Top 0.406: U$18.5 8.97,97.28 JP32.4
N$190
  Top 0.406: JP32.5 12.7,93.79 U$18.4
N$191
  Top 0.406: U$17.1 6.27,104.9 JP31.6
N$192
  Top 0.406: U$17.2 JP31.5
N$193
  Top 0.406: U$17.3 6.27,99.82 JP31.4
N$194
  Top 0.406: U$18.1 6.27,97.28 JP31.3
N$195
  Top 0.406: JP31.2 U$18.2
N$196
  Top 0.406: U$18.3 6.27,92.2 JP31.1
N$197
  Top 0.406: U$19.5 25.23,89.66 JP34.1
N$198
  Top 0.406: JP34.2 28.96,86.17 U$19.4
N$199
  Top 0.406: U$20.5 25.23,82.04 JP34.4
N$200
  Top 0.406: JP34.5 28.96,78.55 U$20.4
N$201
  Top 0.406: U$19.1 22.53,89.66 JP33.6
N$202
  Top 0.406: U$19.2 JP33.5
N$203
  Top 0.406: U$19.3 22.53,84.58 JP33.4
N$204
  Top 0.406: U$20.1 22.53,82.04 JP33.3
N$205
  Top 0.406: U$20.2 JP33.2
N$206
  Top 0.406: U$20.3 22.53,76.96 JP33.1
N$207
  Top 0.406: U$21.5 25.23,104.9 JP36.1
N$208
  Top 0.406: JP36.2 28.96,101.41 U$21.4
N$209
  Top 0.406: U$22.5 25.23,97.28 JP36.4
N$210
  Top 0.406: JP36.5 28.96,93.79 U$22.4
N$211
  Top 0.406: U$21.1 22.53,104.9 JP35.6
N$212
  Top 0.406: U$21.2 JP35.5
N$213
  Top 0.406: U$21.3 22.53,99.82 JP35.4
N$214
  Top 0.406: U$22.1 22.53,97.28 JP35.3
N$215
  Top 0.406: JP35.2 U$22.2
N$216
  Top 0.406: U$22.3 22.53,92.2 JP35.1
N$217
  Top 0.406: U$23.5 41.74,89.66 JP38.1
N$218
  Top 0.406: JP38.2 45.47,86.17 U$23.4
N$219
  Top 0.406: U$24.5 41.74,82.04 JP38.4
N$220
  Top 0.406: JP38.5 45.47,78.55 U$24.4
N$221
  Top 0.406: U$23.1 39.04,89.66 JP37.6
N$222
  Top 0.406: U$23.2 JP37.5
N$223
  Top 0.406: U$23.3 39.04,84.58 JP37.4
N$224
  Top 0.406: U$24.1 39.04,82.04 JP37.3
N$225
  Top 0.406: U$24.2 JP37.2
N$226
  Top 0.406: U$24.3 39.04,76.96 JP37.1
N$227
  Top 0.406: U$27.5 41.74,104.9 JP40.1
N$228
  Top 0.406: JP40.2 45.47,101.41 U$27.4
N$229
  Top 0.406: U$28.5 41.74,97.28 JP40.4
N$230
  Top 0.406: JP40.5 45.47,93.79 U$28.4
N$231
  Top 0.406: U$27.1 39.04,104.9 JP39.6
N$232
  Top 0.406: U$27.2 JP39.5
N$233
  Top 0.406: U$27.3 39.04,99.82 JP39.4
N$234
  Top 0.406: U$28.1 39.04,97.28 JP39.3
N$235
  Top 0.406: JP39.2 U$28.2
N$236
  Top 0.406: U$28.3 39.04,92.2 JP39.1
N$237
  Top 0.406: U$29.5 57.99,89.66 JP46.1
N$238
  Top 0.406: JP46.2 61.72,86.17 U$29.4
N$239
  Top 0.406: U$30.5 57.99,82.04 JP46.4
N$240
  Top 0.406: JP46.5 61.72,78.55 U$30.4
N$241
  Top 0.406: U$29.1 55.29,89.66 JP45.6
N$242
  Top 0.406: U$29.2 JP45.5
N$243
  Top 0.406: U$29.3 55.29,84.58 JP45.4
N$244
  Top 0.406: U$30.1 55.29,82.04 JP45.3
N$245
  Top 0.508: U$25.1 12.95,51.82 JP41.1
N$246
  Top 0.508: U$25.2 14.61,57.53 14.61,54.36 JP41.2
N$247
  Top 0.508: U$25.3 15.88,58.8 15.88,56.9 JP41.3
N$248
  Top 0.508: U$25.4 17.14,60.07 17.14,59.44 JP41.4
N$249
  Top 0.508: U$25.5 17.14,61.34 17.14,61.98 JP41.5
N$250
  Top 0.508: U$25.6 15.88,62.61 15.88,64.52 JP41.6
N$251
  Top 0.508: U$25.7 14.53,63.88 14.53,67.06 JP41.7
N$252
  Top 0.508: U$25.8 12.95,69.6 JP41.8
N$253
  Top 0.508: U$26.1 12.95,31.5 JP42.1
N$254
  Top 0.508: U$26.2 14.61,37.21 14.61,34.04 JP42.2
N$255
  Top 0.508: U$26.3 15.88,38.48 15.88,36.58 JP42.3
N$256
  Top 0.508: U$26.4 17.14,39.75 17.14,39.12 JP42.4
N$257
  Top 0.508: U$26.5 17.14,41.02 17.14,41.66 JP42.5
N$258
  Top 0.508: U$26.6 15.88,42.29 15.88,44.2 JP42.6
N$259
  Top 0.508: U$26.7 14.61,43.56 14.61,46.74 JP42.7
N$260
  Top 0.508: U$26.8 12.95,49.28 JP42.8
N$261
  Top 0.508: U$26.16 7.49,31.5 JP43.1
N$262
  Top 0.508: U$26.15 5.71,37.21 5.71,34.04 JP43.2
N$263
  Top 0.508: U$26.14 4.45,38.48 4.45,36.58 JP43.3
N$264
  Top 0.508: U$26.13 3.17,39.75 3.17,39.12 JP43.4
N$265
  Top 0.508: U$26.12 3.17,41.02 3.17,41.66 JP43.5
N$266
  Top 0.508: U$26.11 4.45,42.29 4.45,44.2 JP43.6
N$267
  Top 0.508: U$26.10 5.71,43.56 5.71,46.74 JP43.7
N$268
  Top 0.508: U$26.9 7.49,49.28 JP43.8
N$269
  Top 0.508: U$25.16 7.49,51.82 JP44.1
N$270
  Top 0.508: U$25.15 5.71,57.53 5.71,54.36 JP44.2
N$271
  Top 0.508: U$25.14 4.45,58.8 4.45,56.9 JP44.3
N$272
  Top 0.508: U$25.13 3.17,60.07 3.17,59.44 JP44.4
N$273
  Top 0.508: U$25.12 3.17,61.34 3.17,61.98 JP44.5
N$274
  Top 0.508: U$25.11 4.45,62.61 4.45,64.52 JP44.6
N$275
  Top 0.508: U$25.10 5.71,63.88 5.71,67.06 JP44.7
N$276
  Top 0.508: U$25.9 7.49,69.6 JP44.8
N$277
  Top 0.406: U$30.2 JP45.2
N$278
  Top 0.406: U$30.3 55.29,76.96 JP45.1
N$279
  Top 0.406: U$35.5 57.99,104.9 JP48.1
N$280
  Top 0.406: JP48.2 61.72,101.41 U$35.4
N$281
  Top 0.406: U$36.5 57.99,97.28 JP48.4
N$282
  Top 0.406: JP48.5 61.72,93.79 U$36.4
N$283
  Top 0.406: U$35.1 55.29,104.9 JP47.6
N$284
  Top 0.406: U$35.2 JP47.5
N$285
  Top 0.406: U$35.3 55.29,99.82 JP47.4
N$286
  Top 0.406: U$36.1 55.29,97.28 JP47.3
N$287
  Top 0.406: JP47.2 U$36.2
N$288
  Top 0.406: U$36.3 55.29,92.2 JP47.1
N$289
  Top 0.406: U$37.5 74.25,89.66 JP54.1
N$290
  Top 0.406: JP54.2 77.98,86.17 U$37.4
N$291
  Top 0.406: U$38.5 74.25,82.04 JP54.4
N$292
  Top 0.406: JP54.5 77.98,78.55 U$38.4
N$293
  Top 0.406: U$37.1 71.55,89.66 JP53.6
N$294
  Top 0.406: U$37.2 JP53.5
N$295
  Top 0.406: U$37.3 71.55,84.58 JP53.4
N$296
  Top 0.406: U$38.1 71.55,82.04 JP53.3
N$297
  Top 0.813: U$31.4 12.04,124.97 JP50.1
N$298
  Top 0.813: U$31.1 5.74,124.97 JP49.6
N$299
  Top 0.813: U$31.2 JP49.5
N$300
  Top 0.813: U$31.3 5.74,119.89 JP49.4
N$301
  Top 0.813: U$33.1 5.74,117.35 JP49.3
N$302
  Top 0.813: U$33.2 JP49.2
N$303
  Top 0.813: U$33.3 5.74,112.27 JP49.1
N$304
  Top 0.813: U$33.4 12.04,117.35 JP50.4
N$305
  Top 0.813: U$32.4 12.04,140.21 JP52.1
N$306
  Top 0.813: U$34.4 12.04,132.59 JP52.4
N$307
  Top 0.813: U$32.1 5.74,140.21 JP51.6
N$308
  Top 0.813: U$32.2 JP51.5
N$309
  Top 0.813: U$32.3 5.74,135.13 JP51.4
N$310
  Top 0.813: U$34.1 5.74,132.59 JP51.3
N$311
  Top 0.813: U$34.2 JP51.2
N$312
  Top 0.813: U$34.3 5.74,127.51 JP51.1
N$313
  Top 0.406: U$38.2 JP53.2
N$314
  Top 0.406: U$38.3 71.55,76.96 JP53.1
N$315
  Top 0.406: U$39.5 74.25,104.9 JP56.1
N$316
  Top 0.406: JP56.2 77.98,101.41 U$39.4
N$317
  Top 0.406: U$40.5 74.25,97.28 JP56.4
N$318
  Top 0.406: JP56.5 77.98,93.79 U$40.4
N$319
  Top 0.406: U$39.1 71.55,104.9 JP55.6
N$320
  Top 0.406: U$39.2 JP55.5
N$321
  Top 0.406: U$39.3 71.55,99.82 JP55.4
N$322
  Top 0.406: U$40.1 71.55,97.28 JP55.3
N$323
  Top 0.406: JP55.2 U$40.2
N$324
  Top 0.406: U$40.3 71.55,92.2 JP55.1
N$325
  Top 0.406: U$41.5 90.5,89.66 JP58.1
N$326
  Top 0.406: JP58.2 94.23,86.17 U$41.4
N$327
  Top 0.406: U$42.5 90.5,82.04 JP58.4
N$328
  Top 0.406: JP58.5 94.23,78.55 U$42.4
N$329
  Top 0.406: U$41.1 87.8,89.66 JP57.6
N$330
  Top 0.406: U$41.2 JP57.5
N$331
  Top 0.406: U$41.3 87.8,84.58 JP57.4
N$332
  Top 0.406: U$42.1 87.8,82.04 JP57.3
N$333
  Top 0.406: U$42.2 JP57.2
N$334
  Top 0.406: U$42.3 87.8,76.96 JP57.1
N$335
  Top 0.406: U$43.5 90.5,104.9 JP60.1
N$336
  Top 0.406: JP60.2 94.23,101.41 U$43.4
N$337
  Top 0.406: U$44.5 90.5,97.28 JP60.4
N$338
  Top 0.406: JP60.5 94.23,93.79 U$44.4
N$339
  Top 0.406: U$43.1 87.8,104.9 JP59.6
N$340
  Top 0.406: U$43.2 JP59.5
N$341
  Top 0.406: U$43.3 87.8,99.82 JP59.4
N$342
  Top 0.406: U$44.1 87.8,97.28 JP59.3
N$343
  Top 0.406: JP59.2 U$44.2
N$344
  Top 0.406: U$44.3 87.8,92.2 JP59.1
N$345
  Top 0.813: U$45.4 30.84,124.97 JP62.1
N$346
  Top 0.813: U$45.1 24.54,124.97 JP61.6
N$347
  Top 0.813: U$45.2 JP61.5
N$348
  Top 0.813: U$45.3 24.54,119.89 JP61.4
N$349
  Top 0.813: U$47.1 24.54,117.35 JP61.3
N$350
  Top 0.813: U$47.2 JP61.2
N$351
  Top 0.813: U$47.3 24.54,112.27 JP61.1
N$352
  Top 0.813: U$47.4 30.84,117.35 JP62.4
N$353
  Top 0.813: U$46.4 30.84,140.21 JP64.1
N$354
  Top 0.813: U$48.4 30.84,132.59 JP64.4
N$355
  Top 0.813: U$46.1 24.54,140.21 JP63.6
N$356
  Top 0.813: U$46.2 JP63.5
N$357
  Top 0.813: U$46.3 24.54,135.13 JP63.4
N$358
  Top 0.813: U$48.1 24.54,132.59 JP63.3
N$359
  Top 0.813: U$48.2 JP63.2
N$360
  Top 0.813: U$48.3 24.54,127.51 JP63.1
N$361
  Top 0.813: U$49.4 49.63,124.97 JP66.1
N$362
  Top 0.813: U$49.1 43.33,124.97 JP65.6
N$363
  Top 0.813: U$49.2 JP65.5
N$364
  Top 0.813: U$49.3 43.33,119.89 JP65.4
N$365
  Top 0.813: U$51.1 43.33,117.35 JP65.3
N$366
  Top 0.813: U$51.2 JP65.2
N$367
  Top 0.813: U$51.3 43.33,112.27 JP65.1
N$368
  Top 0.813: U$51.4 49.63,117.35 JP66.4
N$369
  Top 0.813: U$50.4 49.63,140.21 JP68.1
N$370
  Top 0.813: U$52.4 49.63,132.59 JP68.4
N$371
  Top 0.813: U$50.1 43.33,140.21 JP67.6
N$372
  Top 0.813: U$50.2 JP67.5
N$373
  Top 0.813: U$50.3 43.33,135.13 JP67.4
N$374
  Top 0.813: U$52.1 43.33,132.59 JP67.3
N$375
  Top 0.813: U$52.2 JP67.2
N$376
  Top 0.813: U$52.3 43.33,127.51 JP67.1
N$377
  Top 0.813: U$53.4 68.43,124.97 JP70.1
N$378
  Top 0.813: U$53.1 62.13,124.97 JP69.6
N$379
  Top 0.813: U$53.2 JP69.5
N$380
  Top 0.813: U$53.3 62.13,119.89 JP69.4
N$381
  Top 0.813: U$55.1 62.13,117.35 JP69.3
N$382
  Top 0.813: U$55.2 JP69.2
N$383
  Top 0.813: U$55.3 62.13,112.27 JP69.1
N$384
  Top 0.813: U$55.4 68.43,117.35 JP70.4
N$385
  Top 0.813: U$54.4 68.43,140.21 JP72.1
N$386
  Top 0.813: U$56.4 68.43,132.59 JP72.4
N$387
  Top 0.813: U$54.1 62.13,140.21 JP71.6
N$388
  Top 0.813: U$54.2 JP71.5
N$389
  Top 0.813: U$54.3 62.13,135.13 JP71.4
N$390
  Top 0.813: U$56.1 62.13,132.59 JP71.3
N$391
  Top 0.813: U$56.2 JP71.2
N$392
  Top 0.813: U$56.3 62.13,127.51 JP71.1
N$393
  Top 0.508: U$57.1 98.3,51.82 JP73.1
N$394
  Top 0.508: U$57.2 99.95,57.53 99.95,54.36 JP73.2
N$395
  Top 0.508: U$57.3 101.22,58.8 101.22,56.9 JP73.3
N$396
  Top 0.508: U$57.4 102.49,60.07 102.49,59.44 JP73.4
N$397
  Top 0.508: U$57.5 102.49,61.34 102.49,61.98 JP73.5
N$398
  Top 0.508: U$57.6 101.22,62.61 101.22,64.52 JP73.6
N$399
  Top 0.508: U$57.7 99.87,63.88 99.87,67.06 JP73.7
N$400
  Top 0.508: U$57.8 98.3,69.6 JP73.8
N$401
  Top 0.508: U$58.1 98.3,31.5 JP74.1
N$402
  Top 0.508: U$58.2 99.95,37.21 99.95,34.04 JP74.2
N$403
  Top 0.508: U$58.3 101.22,38.48 101.22,36.58 JP74.3
N$404
  Top 0.508: U$58.4 102.49,39.75 102.49,39.12 JP74.4
N$405
  Top 0.508: U$58.5 102.49,41.02 102.49,41.66 JP74.5
N$406
  Top 0.508: U$58.6 101.22,42.29 101.22,44.2 JP74.6
N$407
  Top 0.508: U$58.7 99.95,43.56 99.95,46.74 JP74.7
N$408
  Top 0.508: U$58.8 98.3,49.28 JP74.8
N$409
  Top 0.508: U$58.16 92.84,31.5 JP75.1
N$410
  Top 0.508: U$58.15 91.06,37.21 91.06,34.04 JP75.2
N$411
  Top 0.508: U$58.14 89.79,38.48 89.79,36.58 JP75.3
N$412
  Top 0.508: U$58.13 88.52,39.75 88.52,39.12 JP75.4
N$413
  Top 0.508: U$58.12 88.52,41.02 88.52,41.66 JP75.5
N$414
  Top 0.508: U$58.11 89.79,42.29 89.79,44.2 JP75.6
N$415
  Top 0.508: U$58.10 91.06,43.56 91.06,46.74 JP75.7
N$416
  Top 0.508: U$58.9 92.84,49.28 JP75.8
N$417
  Top 0.508: U$57.16 92.84,51.82 JP76.1
N$418
  Top 0.508: U$57.15 91.06,57.53 91.06,54.36 JP76.2
N$419
  Top 0.508: U$57.14 89.79,58.8 89.79,56.9 JP76.3
N$420
  Top 0.508: U$57.13 88.52,60.07 88.52,59.44 JP76.4
N$421
  Top 0.508: U$57.12 88.52,61.34 88.52,61.98 JP76.5
N$422
  Top 0.508: U$57.11 89.79,62.61 89.79,64.52 JP76.6
N$423
  Top 0.508: U$57.10 91.06,63.88 91.06,67.06 JP76.7
N$424
  Top 0.508: U$57.9 92.84,69.6 JP76.8
N$465
  Top 0.813: U$63.4 87.22,124.97 JP86.1
N$466
  Top 0.813: U$63.1 80.92,124.97 JP85.6
N$467
  Top 0.813: U$63.2 JP85.5
N$468
  Top 0.813: U$63.3 80.92,119.89 JP85.4
N$469
  Top 0.813: U$65.1 80.92,117.35 JP85.3
N$470
  Top 0.813: U$65.2 JP85.2
N$471
  Top 0.813: U$65.3 80.92,112.27 JP85.1
N$472
  Top 0.813: U$65.4 87.22,117.35 JP86.4
N$473
  Top 0.813: U$64.4 87.22,140.21 JP88.1
N$474
  Top 0.813: U$66.4 87.22,132.59 JP88.4
N$475
  Top 0.813: U$64.1 80.92,140.21 JP87.6
N$476
  Top 0.813: U$64.2 JP87.5
N$477
  Top 0.813: U$64.3 80.92,135.13 JP87.4
N$478
  Top 0.813: U$66.1 80.92,132.59 JP87.3
N$479
  Top 0.813: U$66.2 JP87.2
N$480
  Top 0.813: U$66.3 80.92,127.51 JP87.1
N$481
  Top 0.305: JP92.1 5.42,5.42 U$68.5
N$482
  Top 0.305: JP92.2 4.58,7.12 U$68.4
N$483
  Top 0.305: JP92.3 U$68.3
N$484
  Top 0.305: JP92.4 4.58,8.12 U$68.2
N$485
  Top 0.305: JP92.5 5.42,9.82 U$68.1
N$486
  Top 0.305: U$67.5 5.42,18.12 JP91.1
N$487
  Top 0.305: U$67.4 4.57,19.81 JP91.2
N$488
  Top 0.305: U$67.3 JP91.3
N$489
  Top 0.305: U$67.2 4.58,20.82 JP91.4
N$490
  Top 0.305: U$67.1 5.42,22.52 JP91.5
N$491
  Top 0.305: U$68.10 9.82,9.82 JP90.1
N$492
  Top 0.305: U$68.9 10.66,8.12 JP90.2
N$493
  Top 0.305: U$68.8 JP90.3
N$494
  Top 0.305: U$68.7 10.66,7.12 JP90.4
N$495
  Top 0.305: U$68.6 9.82,5.42 JP90.5
N$496
  Top 0.305: U$67.10 9.82,22.52 JP89.1
N$497
  Top 0.305: JP89.2 10.67,20.83 U$67.9
N$498
  Top 0.305: JP89.3 U$67.8
N$499
  Top 0.305: U$67.7 10.66,19.82 JP89.4
N$500
  Top 0.305: U$67.6 9.82,18.12 JP89.5
N$501
  Top 0.305: JP96.1 21.68,5.42 U$70.5
N$502
  Top 0.305: JP96.2 20.84,7.12 U$70.4
N$503
  Top 0.305: JP96.3 U$70.3
N$504
  Top 0.305: JP96.4 20.84,8.12 U$70.2
N$505
  Top 0.305: JP96.5 21.68,9.82 U$70.1
N$506
  Top 0.305: U$69.5 21.68,18.12 JP95.1
N$507
  Top 0.305: U$69.4 21.67,19.81 20.83,19.81 JP95.2
N$508
  Top 0.305: U$69.3 JP95.3
N$509
  Top 0.305: U$69.2 20.84,20.82 JP95.4
N$510
  Top 0.305: U$69.1 21.68,22.52 JP95.5
N$511
  Top 0.305: U$70.10 26.08,9.82 JP94.1
N$512
  Top 0.305: U$70.9 26.92,8.12 JP94.2
N$513
  Top 0.305: U$70.8 JP94.3
N$514
  Top 0.305: U$70.7 26.92,7.12 JP94.4
N$515
  Top 0.305: U$70.6 26.08,5.42 JP94.5
N$516
  Top 0.305: U$69.10 26.08,22.52 JP93.1
N$517
  Top 0.305: JP93.2 26.92,20.83 U$69.9
N$518
  Top 0.305: JP93.3 U$69.8
N$519
  Top 0.305: U$69.7 26.92,19.82 JP93.4
N$520
  Top 0.305: U$69.6 26.08,18.12 JP93.5
N$521
  Top 0.305: JP100.1 37.93,5.42 U$72.5
N$522
  Top 0.305: JP100.2 37.09,7.12 U$72.4
N$523
  Top 0.305: JP100.3 U$72.3
N$524
  Top 0.305: JP100.4 37.09,8.12 U$72.2
N$525
  Top 0.305: JP100.5 37.93,9.82 U$72.1
N$526
  Top 0.305: U$71.5 37.93,18.12 JP99.1
N$527
  Top 0.305: U$71.4 37.08,19.81 JP99.2
N$528
  Top 0.305: U$71.3 JP99.3
N$529
  Top 0.305: U$71.2 37.09,20.82 JP99.4
N$530
  Top 0.305: U$71.1 37.93,22.52 JP99.5
N$531
  Top 0.305: U$72.10 42.33,9.82 JP98.1
N$532
  Top 0.305: U$72.9 43.17,8.12 JP98.2
N$533
  Top 0.305: U$72.8 JP98.3
N$534
  Top 0.305: U$72.7 43.17,7.12 JP98.4
N$535
  Top 0.305: U$72.6 42.33,5.42 JP98.5
N$536
  Top 0.305: U$71.10 42.33,22.52 JP97.1
N$537
  Top 0.305: JP97.2 43.18,20.83 U$71.9
N$538
  Top 0.305: JP97.3 U$71.8
N$539
  Top 0.305: U$71.7 43.17,19.82 JP97.4
N$540
  Top 0.305: U$71.6 42.33,18.12 JP97.5
N$541
  Top 0.305: JP104.1 54.19,5.42 U$74.5
N$542
  Top 0.305: JP104.2 53.35,7.12 U$74.4
N$543
  Top 0.305: JP104.3 U$74.3
N$544
  Top 0.305: JP104.4 53.35,8.12 U$74.2
N$545
  Top 0.305: JP104.5 54.19,9.82 U$74.1
N$546
  Top 0.305: U$73.5 54.19,18.12 JP103.1
N$547
  Top 0.305: U$73.4 53.34,19.81 JP103.2
N$548
  Top 0.305: U$73.3 JP103.3
N$549
  Top 0.305: U$73.2 53.35,20.82 JP103.4
N$550
  Top 0.305: U$73.1 54.19,22.52 JP103.5
N$551
  Top 0.305: U$74.10 58.59,9.82 JP102.1
N$552
  Top 0.305: U$74.9 59.43,8.12 JP102.2
N$553
  Top 0.305: U$74.8 JP102.3
N$554
  Top 0.305: U$74.7 59.43,7.12 JP102.4
N$555
  Top 0.305: U$74.6 58.59,5.42 JP102.5
N$556
  Top 0.305: U$73.10 58.59,22.52 JP101.1
N$557
  Top 0.305: JP101.2 59.44,20.83 U$73.9
N$558
  Top 0.305: JP101.3 U$73.8
N$559
  Top 0.305: U$73.7 59.43,19.82 JP101.4
N$560
  Top 0.305: U$73.6 58.59,18.12 JP101.5
N$561
  Top 0.305: JP108.1 70.44,5.42 U$76.5
N$562
  Top 0.305: JP108.2 69.6,7.12 U$76.4
N$563
  Top 0.305: JP108.3 U$76.3
N$564
  Top 0.305: JP108.4 69.6,8.12 U$76.2
N$565
  Top 0.305: JP108.5 70.44,9.82 U$76.1
N$566
  Top 0.305: U$75.5 70.44,18.12 JP107.1
N$567
  Top 0.305: U$75.4 69.6,19.81 JP107.2
N$568
  Top 0.305: U$75.3 JP107.3
N$569
  Top 0.305: U$75.2 69.6,20.82 JP107.4
N$570
  Top 0.305: U$75.1 70.44,22.52 JP107.5
N$571
  Top 0.305: U$76.10 74.84,9.82 JP106.1
N$572
  Top 0.305: U$76.9 75.68,8.12 JP106.2
N$573
  Top 0.305: U$76.8 JP106.3
N$574
  Top 0.305: U$76.7 75.68,7.12 JP106.4
N$575
  Top 0.305: U$76.6 74.84,5.42 JP106.5
N$576
  Top 0.305: U$75.10 74.84,22.52 JP105.1
N$577
  Top 0.305: JP105.2 75.69,20.83 74.85,20.83 U$75.9
N$578
  Top 0.305: JP105.3 U$75.8
N$579
  Top 0.305: U$75.7 75.68,19.82 JP105.4
N$580
  Top 0.305: U$75.6 74.84,18.12 JP105.5
N$581
  Top 0.305: JP112.1 86.7,5.42 U$78.5
N$582
  Top 0.305: JP112.2 85.86,7.12 U$78.4
N$583
  Top 0.305: JP112.3 U$78.3
N$584
  Top 0.305: JP112.4 85.86,8.12 U$78.2
N$585
  Top 0.305: JP112.5 86.7,9.82 U$78.1
N$586
  Top 0.305: U$77.5 86.7,18.12 JP111.1
N$587
  Top 0.305: U$77.4 85.85,19.81 JP111.2
N$588
  Top 0.305: U$77.3 JP111.3
N$589
  Top 0.305: U$77.2 85.86,20.82 JP111.4
N$590
  Top 0.305: U$77.1 86.7,22.52 JP111.5
N$591
  Top 0.305: U$78.10 91.1,9.82 JP110.1
N$592
  Top 0.305: U$78.9 91.94,8.12 JP110.2
N$593
  Top 0.305: U$78.8 JP110.3
N$594
  Top 0.305: U$78.7 91.94,7.12 JP110.4
N$595
  Top 0.305: U$78.6 91.1,5.42 JP110.5
N$596
  Top 0.305: U$77.10 91.1,22.52 JP109.1
N$597
  Top 0.305: JP109.2 91.95,20.83 U$77.9
N$598
  Top 0.305: JP109.3 U$77.8
N$599
  Top 0.305: U$77.7 91.94,19.82 JP109.4
N$600
  Top 0.305: U$77.6 91.1,18.12 JP109.5

## Text on the board
tDocu: ↓ HT18-27 | ↓ HT18-28 | ↓ HT18-29 | ↓ HT18-30 | ↓ HT18-31 | HyTech Racing | HyTech Racing | HyTech Racing | HyTech Racing | HyTech Racing | SOT223 | SOT223 | SOT223 | SOT223 | SOT223 | HyTech Racing | HyTech Racing | HyTech Racing | HyTech Racing | HyTech Racing | HyTech Racing | ↑HT18-21 | ↑HT18-22 | ↑HT18-23 | ↑HT18-24 | ↑HT18-25 | ↑HT18-26 | SOT-23-5 | SOT-23-5 | SOT-23-5 | SOT-23-5 | SOT-23-5 | SOT-23-5 | HyTech Racing | HyTech Racing | HyTech Racing | HyTech Racing | HyTech Racing | ↑HT18-16 | ↑HT18-17 | ↑HT18-18 | ↑HT18-19 | ↑HT18-20 | SOIC-16 | SOIC-16 | SOIC-16 | SOIC-16 | SOIC-16 | HyTech Racing | HyTech Racing | HyTech Racing | HyTech Racing | HyTech Racing | HyTech Racing | ↑HT18-10 | ↑HT18-11 | ↑HT18-12 | ↑HT18-13 | ↑HT18-14 | ↑HT18-15 | VSSOP-10 | VSSOP-10 | VSSOP-10 | VSSOP-10 | VSSOP-10 | VSSOP-10